# Altium PCB Arduino_三明治开发板_case01.PcbDoc
Units mil, origin at the board's own origin, x right, y up, seen from the top; angles counter-clockwise.
Board outline 2700 x 2100 mil, 2 copper layers (Top Layer, Bottom Layer), stack 46.444 mil thick; 32 components, 39 nets, 141 pads, 42 vias.
Unrouted connection lines stored in the file: 2.
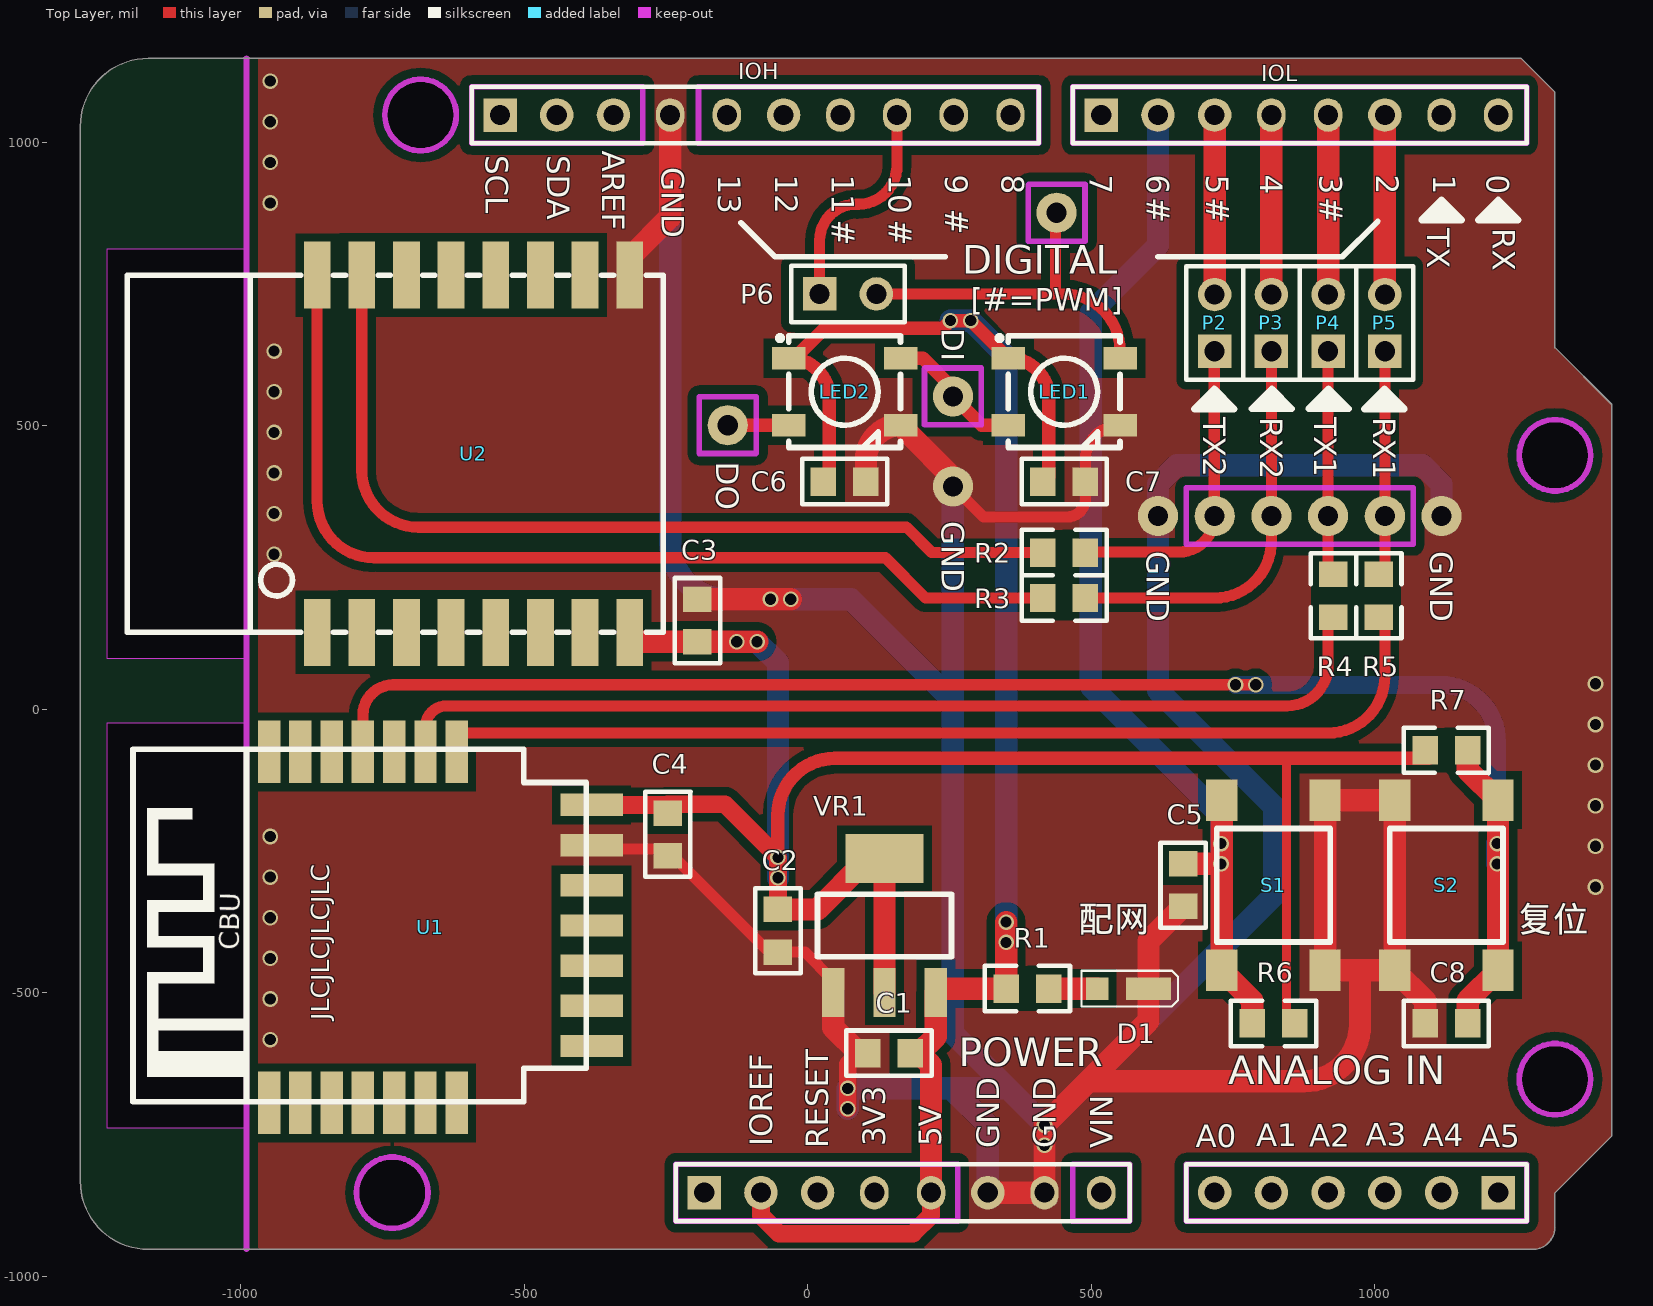
[diagram p0: Top Layer view]
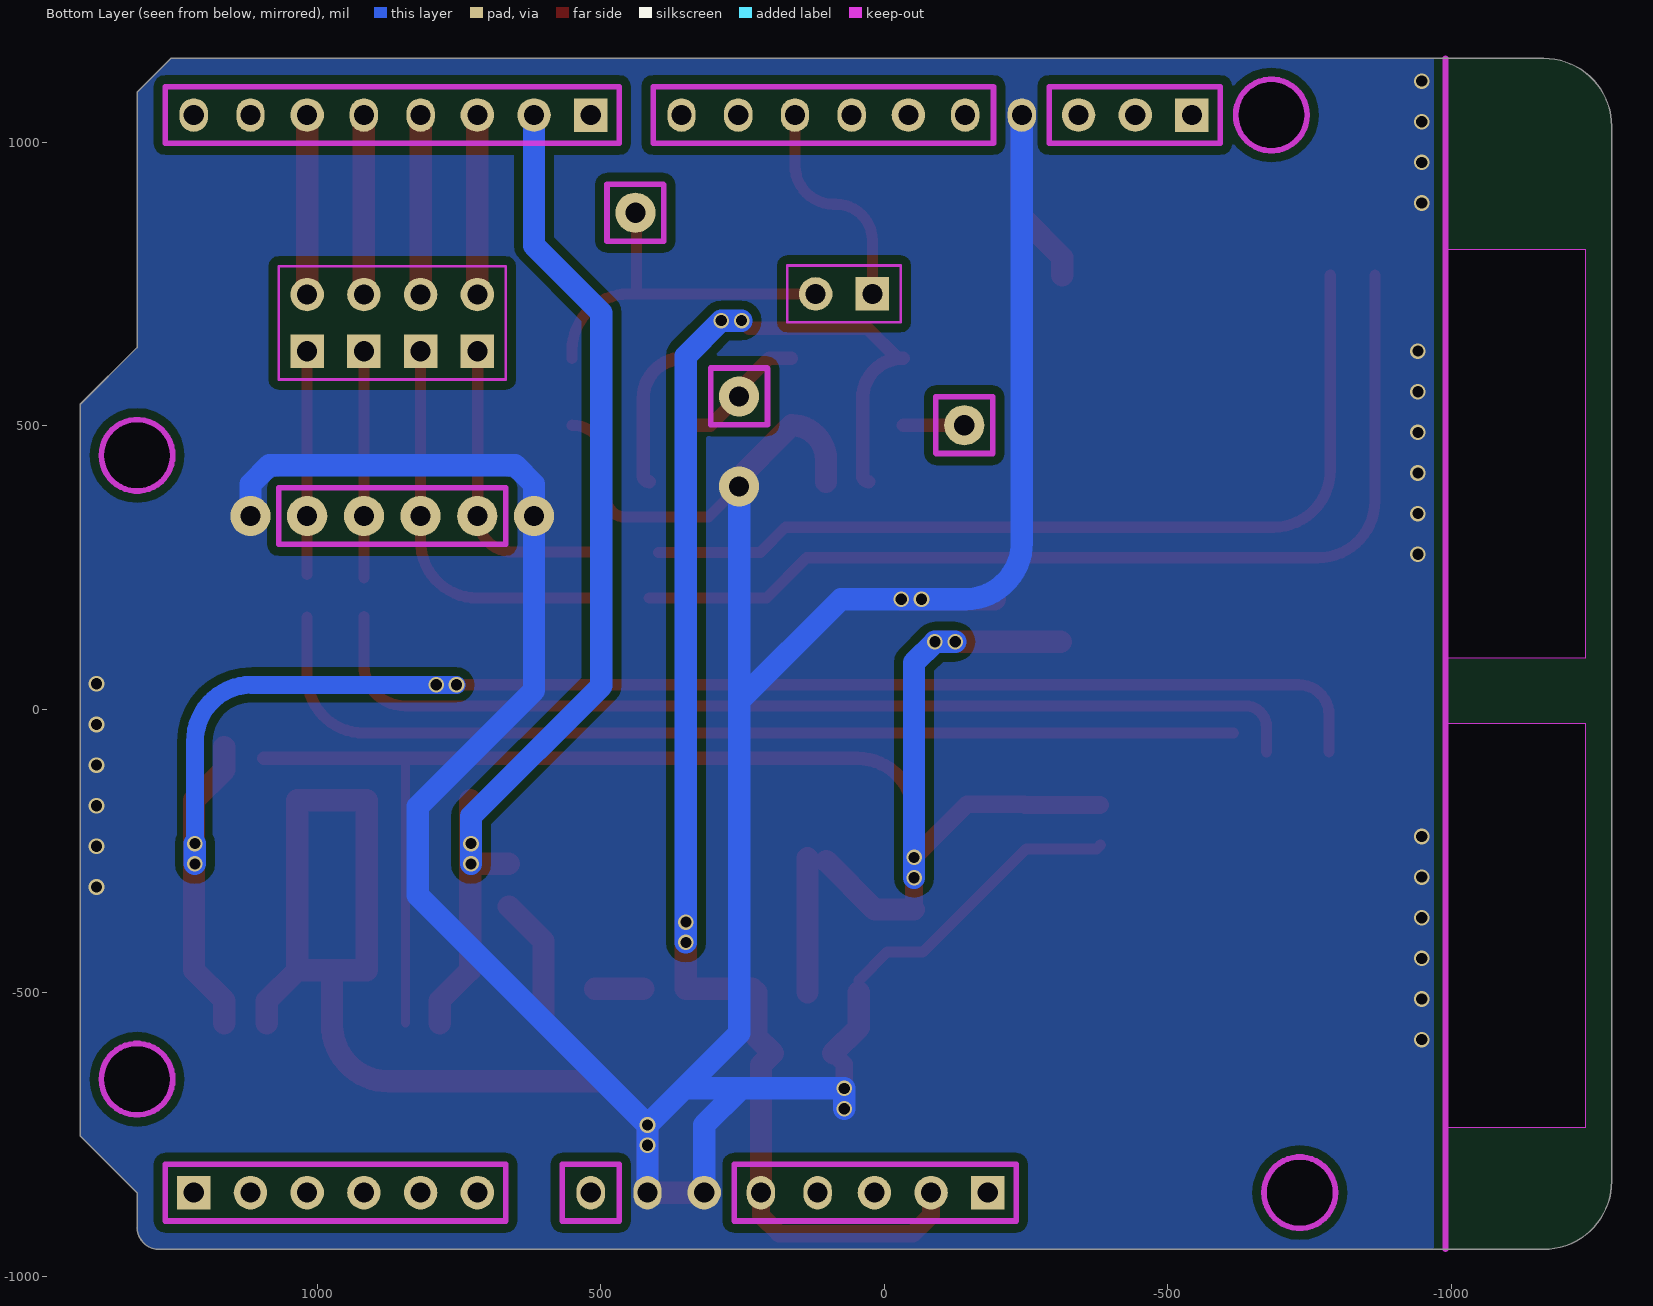
[diagram p1: Bottom Layer view, seen from below]

## Layer stack, top to bottom
Top Solder: solder mask 0.4, Solder Resist, Dk 3.5
Top Layer: signal copper 1.4
Dielectric 1: dielectric 43.6441, FR-4, Dk 4.8
Bottom Layer: signal copper 1.4
Bottom Solder: solder mask 0.4, Solder Resist, Dk 3.5

## Board outline
-1282.56,-832.42 -1282.56,1027.58 cw(c-1162.56,1027.58) -1162.56,1147.58 1257.44,1147.58 1317.44,1087.58 1317.44,637.58 1417.44,537.58 1417.44,-752.42 1317.44,-852.42 1317.44,-913.05 cw(c1278.07,-913.05) 1278.07,-952.42 -1162.56,-952.42 cw(c-1162.56,-832.42)
cut-out: -1235.73,89.49 -989.42,89.49 -989.42,811.25 -1235.73,811.25
cut-out: -1235.73,-738.31 -989.42,-738.31 -989.42,-24.42 -1235.73,-24.42
cut-out: -745.55,1047.58 ccw(c-682.56,1047.58) -682.56,984.59 ccw(c-682.56,1047.58) -619.57,1047.58 ccw(c-682.56,1047.58) -682.56,1110.57 ccw(c-682.56,1047.58)
cut-out: 1254.45,-652.42 ccw(c1317.44,-652.42) 1317.44,-715.41 ccw(c1317.44,-652.42) 1380.43,-652.42 ccw(c1317.44,-652.42) 1317.44,-589.43 ccw(c1317.44,-652.42)
cut-out: 1254.45,447.58 ccw(c1317.44,447.58) 1317.44,384.59 ccw(c1317.44,447.58) 1380.43,447.58 ccw(c1317.44,447.58) 1317.44,510.57 ccw(c1317.44,447.58)
cut-out: -795.55,-852.42 ccw(c-732.56,-852.42) -732.56,-915.41 ccw(c-732.56,-852.42) -669.57,-852.42 ccw(c-732.56,-852.42) -732.56,-789.43 ccw(c-732.56,-852.42)

## Design rules (kind name [scope] priority, off if disabled: settings)
Clearance [All] p1: gap=15
PolygonConnect [All] p1: connectstyle=Direct reliefconductorwidth=31.5 reliefentries=4 polygonreliefangle="90 Angle" airgapwidth=7.87
RoomDefinition Xduino_Uno [InComponentClass('Xduino_Uno')] p1: confinementstyle=ConfineIn formatcopy=TRUE lockcomponents=FALSE outline 1462.58,-997.84 1532.58,-997.84 1532.58,-871.84 1462.58,-871.84
RoutingVias [All] p1: holewidth=28 width=50 viastyle="Through Hole" minholewidth=28 minwidth=50 maxholewidth=28 maxwidth=50
SolderMaskExpansion [All] p1: expansion=4
Width [All] p1: maxlimit=100 minlimit=10 preferedwidth=10
29 further rules are at their usual default settings.

## Components (designator, comment, footprint, x,y, rotation, side; value= is the part's Value field where it differs from the comment)
"ANALOG IN" "单排插座 1×9T" HDR1X6Z 1217.44,-852.42 r180 top
C1 "1206 0.1uF" 0805-CAP-min 143.24,-606.48 r270 top
C2 "1206 0.1uF" 0805-CAP-min -52.58,-390.61 r180 top
C3 "1206 0.1uF" 0805-CAP-min -194.54,156.32 r0 top
C4 "1206 0.1uF" 0805-CAP-min -246.77,-220.82 r180 top
C5 "1206 0.1uF" 0805-CAP-min 661.94,-310.27 r0 top
C6 "1206 0.1uF" 0805-CAP-min 65.13,401.26 r90 top
C7 "1206 0.1uF" 0805-CAP-min 452.1,401.26 r90 top
C8 "1206 0.1uF" 0805-CAP-min 1125.96,-553.88 r270 top
D1 "LED" LED3014-FD 555.42,-492.73 r0 top
IOH "单排插座 1×12T" HDR1X10Z -542.56,1047.58 r0 top
IOL "单排插座 1×9T" HDR1X8Z 517.44,1047.58 r0 top
LED1 "WS2812C" LED-SMD_4P-L5.0-W5.0-TL 452.15,559.73 r0 top
LED2 "WS2812C" LED-SMD_4P-L5.0-W5.0-TL 65.18,559.73 r0 top
P2 "HDR1*2" HDR1X2 717.44,631.04 r90 top
P3 "HDR1*2" HDR1X2 817.44,631.04 r90 top
P4 "HDR1*2" HDR1X2 917.44,631.04 r90 top
P5 "HDR1*2" HDR1X2 1017.44,631.04 r90 top
P6 "HDR1*2" HDR1X2 20.94,732.19 r0 top
POWER "单排插座 1×9T" HDR1X8Z -182.56,-852.42 r0 top
R1 "0805 1K" 0805-R-min 387.26,-492.68 r270 top
R2 "0805 1K" 0805-R-min 452.1,275.99 r90 top
R3 "0805 1K" 0805-R-min 452.1,195.99 r90 top
R4 "0805 1K" 0805-R-min 926.74,200 r180 top
R5 "0805 1K" 0805-R-min 1006.84,200 r180 top
R6 "0805 1K" 0805-R-min 821.19,-553.88 r90 top
R7 "0805 1K" 0805-R-min 1125.86,-72.41 r270 top
S1 "SW-SPST" Switch 821.14,-310.32 r270 top locked
S2 "SW-SPST" Switch 1125.91,-310.32 r90 top locked
U1 "CBU Wi-Fi&Bluetooth 模组" "CBU WIFI&BLUETOOTH" -380.91,-381.36 r90 top locked
U2 "BT3L" BLUETOOTH-SMD_16P-L24.0-W16.0-P2.0-BT3L -589.39,450.37 r90 top locked
VR1 "AMS1117-3.3" SOT-223 135.28,-381.2 r270 top

## Footprints (in the part's own frame and the unit in brackets; to place one, negate y for a bottom-side part, rotate by r counter-clockwise, add the part's x,y. Pads: shape width x height; smd on the part's side, far side on the other; paste and mask are expansions set on the pad)
0805-CAP-min [mil]
  rect 50x45 smd: 1(0,37.52) 2(0,-37.5)
  silkscreen extent -40,-75 40,75, body extent -24,-39 24,39, height 20
0805-R-min [mil]
  rect 50x45 smd: 1(0,-37.52) 2(0,37.5)
  silkscreen extent -40,-75 40,75, body extent -24,-39 24,39, height 20
BLUETOOTH-SMD_16P-L24.0-W16.0-P2.0-BT3L [mm]
  rect 3x1.2 smd: 1(-8,7) 2(-8,5) 3(-8,3) 4(-8,1) 5(-8,-1) 6(-8,-3) 7(-8,-5) 8(-8,-7) 9(8,-7) 10(8,-5) 11(8,-3) 12(8,-1) 13(8,1) 14(8,3) 15(8,5) 16(8,7)
  silkscreen extent -8,-8.5 8,15.5
"CBU WIFI&BLUETOOTH" [mm]
  rect 2.8x1 smd: 1(-7.947,14.446) 2(-7.947,13.046) 3(-7.947,11.646) 4(-7.947,10.246) 5(-7.947,8.846) 6(-7.947,7.446) 7(-7.947,6.046) 15(7.773,6.046) 16(7.773,7.446) 17(7.773,8.846) 18(7.773,10.246) 19(7.773,11.646) 20(7.773,13.046) 21(7.773,14.446)
  rect 1x2.8 smd: 8(-5.4,0) 9(-3.6,0) 10(-1.8,0) 11(0,0) 12(1.8,0) 13(3.6,0) 14(5.4,0)
  silkscreen extent -7.9,0.25 7.9,20.55
HDR1X2 [mm] "Connector; Header; 2 Position"
  rect 1.5x1.5 hole 0.9: 1(0,0)
  round 1.5 hole 0.9: 2(2.54,0)
  silkscreen extent -1.27,-1.27 3.81,1.27
HDR1X6Z [mm] "Connector; Header; 5 Position"
  rect 1.5x1.5 hole 0.9: 1(0,0)
  round 1.5 hole 0.9: 2(2.54,0) 3(5.08,0) 4(7.62,0) 5(10.16,0) 6(12.7,0)
  silkscreen extent -1.27,-1.27 13.97,1.27, body extent -1.27,-1.25 13.97,1.25, height 8.65
HDR1X8Z [mm] "Connector; Header; 8 Position"
  rect 1.5x1.5 hole 0.9: 1(0,0)
  round 1.5 hole 0.9: 2(2.54,0) 3(5.08,0) 6(12.7,0)
  oval 1.27x1.5 hole 0.9: 4(7.62,0) 5(10.16,0) 7(15.24,0) 8(17.78,0)
  silkscreen extent -1.27,-1.27 19.05,1.27, body extent -1.27,-1.25 19.05,1.25, height 8.65
HDR1X10Z [mm] "Connector; Header; 10 Position"
  rect 1.5x1.5 hole 0.9: 1(0,0)
  round 1.5 hole 0.9: 2(2.54,0) 3(5.08,0) 6(12.7,0)
  oval 1.27x1.5 hole 0.9: 4(7.62,0) 5(10.16,0) 7(15.24,0) 8(17.78,0) 9(20.32,0) 10(22.86,0)
  silkscreen extent -1.27,-1.27 24.13,1.27, body extent -1.27,-1.25 24.13,1.25, height 8.65
LED3014-FD [mm]
  rect 1x1 smd: 1(-1.15,0)
  rect 2x1 smd: 2(1.15,0)
  silkscreen extent -1.85,-0.8 2.47,0.8
LED-SMD_4P-L5.0-W5.0-TL [mm]
  rect 1.5x1 smd: 1(-2.5,1.5) 2(-2.5,-1.5) 3(2.5,-1.5) 4(2.5,1.5)
  silkscreen extent -3,-2.5 2.5,2.5
SOT-223 [mm]
  rect 2.2x1 smd: 1(3,-2.3) 2(3,0) 3(3,2.3)
  rect 2.2x3.5 smd: 2(-3,0)
  silkscreen extent -1.4,-3 1.4,3, body extent -3.49,-3.24 3.49,3.24, height 1.64
Switch [mm]
  rect 1.85x1.4 smd mask+0.102: 1(-3.81,2.312) 1(3.81,2.312) 2(-3.81,-2.312) 2(3.81,-2.312)
  silkscreen extent -2.54,-2.54 2.54,2.54

## Part data
"ANALOG IN": library part "Header 6", "Header, 6-Pin"
C1 C2 C3 C4 C5 C6 C7 C8: library part Cap-1206, "Capacitor"
D1: library part LED-3014
IOH: library part "Header 10", "Header, 10-Pin"
IOL POWER: library part "Header 8", "Header, 8-Pin"
P2 P3 P4 P5 P6: library part HDR1*2_2
R1 R2 R3 R4 R5 R6 R7: library part Res-0805, "Resistor"
S1 S2: "Single-Pole, Single-Throw Switch"
VR1: library part "SOT-223 AMS1117-3.3", "低压差线性稳压(LDO)"

## Free pads (board coordinates)
  round 70.87 hole 35.43: 38(1017.49,340.53) 39(917.49,340.53) 40(817.49,340.53) 41(-141.07,500.68) 41(255.91,392.86) 41(255.91,551.55) 41(438.78,875.32) 41(617.49,340.53) 41(717.49,340.53) 41(1117.49,340.53)

## Via types
v1: diameter 27.56, hole 19.68, Top Layer to Bottom Layer, 42 vias

## Nets (pads, with @x,y where several pads share a name; then routed paths per layer and width w, separated by ;. In a path a pad name is that pad's centre, name@x,y a point inside that pad or via, vN(x,y) a via of type N, cw(c..) or ccw(c..) an arc to the next point about the centre after c; other vN are vias at no path point)
+3V3: POWER.4 | length 8.5
  Bottom Layer w39.37: POWER.4 POWER.4@117.44,-843.91
+3V3_2: C2.2 C3.2 C4.2 R6.1 R7.1 U1.14 U2.8 VR1.2 | length 3313.2
  Top Layer w15.75: R6.1@844.17,-553.6 844.17,-91.04
  Top Layer w23.62: v1(-52.58,-261.23) -52.58,-186.84 cw(c47.42,-186.84) 47.42,-86.84 840.45,-86.84 R7.1@1093.77,-86.84
  Top Layer w31.5: U1.14 C4.2@-247.87,-168.77 ; C4.2@-246.77,-167.67 -146.14,-167.67 v1(-52.58,-261.23) v1(-52.58,-297.04) C2.2
  Top Layer w39.37: U2.8@-311.17,118.82 v1(-89.3,118.82) ; C2.2 16.92,-353.11 VR1.2@102.12,-267.92 ; VR1.2@135.28,-499.31 VR1.2@135.28,-263.09
  Bottom Layer w39.37: v1(-125.12,118.82) v1(-89.3,118.82) -52.58,82.1 v1(-52.58,-261.23) v1(-52.58,-297.04)
+5V: C1.1 C6.1 C7.1 LED1.1 LED2.1 POWER.2 POWER.5 R1.1 VR1.3 | length 3144.2
  Top Layer w23.62: C6.1 ccw(c27.61,411.88) 38.23,411.88 38.23,547.31 ccw(c-33.25,547.31) LED2.1 -23.27,618.78 29.92,671.97 238.39,671.97 v1(251.56,685.13) v1(287.37,685.13) LED1.1 cw(c353.72,547.44) 425.07,547.44 425.07,411.75 cw(c414.58,411.75) C7.1
  Top Layer w31.5: POWER.2 -82.56,-892.66 -50.47,-924.75 185.33,-924.75 217.44,-892.63 POWER.5
  Top Layer w39.37: POWER.5 217.44,-627.53 196.39,-606.48 225.83,-577.04 VR1.3 ; VR1.3@232.47,-492.68 R1.1 v1(349.74,-375.4)
  Bottom Layer w39.37: v1(251.56,685.13) v1(287.37,685.13) 349.74,622.76 v1(349.74,-375.4) v1(349.74,-411.22)
AD0: "ANALOG IN.6"
AD1: "ANALOG IN.5"
AD2: "ANALOG IN.4"
AD3: "ANALOG IN.3"
AD4/SDA: "ANALOG IN.2" IOH.2
AD5/SCL: "ANALOG IN.1" IOH.1
AREF: IOH.3
GND: C1.2 C2.1 C3.1 C4.1 C5.2 C6.2 C7.2 C8.2 D1.2 IOH.4 LED1.3 LED2.3 pad.41@255.91,392.86 pad.41@617.49,340.53 pad.41@1117.49,340.53 POWER.6 POWER.7 S1.1 S2.1 U1.13 U2.9 VR1.1 | length 9586.7
  Top Layer w19.68: U1.13 -374.03,-246.52 -250.21,-246.52 -68.59,-428.13 C2.1 -5.1,-428.13 44.73,-477.96 VR1.1 ; pad.41@255.91,392.86 309.96,338.81 457.16,338.81 ccw(c457.16,371.24) 489.6,371.24 C7.2 489.6,439.71 cw(c550.57,439.71) LED1.3
  Top Layer w31.5: v1(70.44,-704.41) 70.44,-626.13 C1.2@90.09,-606.48
  Top Layer w39.37: U2.9 -313.8,796.26 -242.56,867.5 IOH.4 ; C3.1 v1(-29.87,193.84) ; VR1.1 44.73,-561.12 C1.2@90.09,-606.48 ; C6.2 102.63,439.71 cw(c163.6,439.71) LED2.3 pad.41@271.43,392.86 ; POWER.6 POWER.7 v1(417.44,-768.91) v1(417.44,-733.1) 600.7,-549.84 D1.2 600.7,-409.01 C5.2 ; 496.01,-656.22 873.61,-656.22 ccw(c873.61,-556.22) 973.61,-556.22 973.61,-460.32 ; C8.2 1088.46,-513.9 S2.1@1034.89,-460.32 ; 973.61,-460.32 S2.1@1034.89,-460.32 ; 973.61,-460.32 912.16,-460.32 912.16,-160.32 1034.89,-160.32 S2.1@1034.89,-460.32
  Bottom Layer w39.37: IOH.4 -242.56,293.84 ccw(c-142.56,293.84) -142.56,193.84 76.19,193.84 255.91,14.13 255.91,-89.66 ; v1(70.44,-704.41) v1(70.44,-668.6) 352.94,-668.6 ; 252.94,-668.6 317.44,-733.1 POWER.6 ; pad.41@255.91,392.86 255.91,-89.66 ; POWER.7 v1(417.44,-768.91) v1(417.44,-733.1) ; pad.41@1107.18,350.84 1117.49,340.53 1117.49,396.66 1083.93,430.21 651.05,430.21 617.49,396.65 617.49,340.53 617.49,33.14 822.29,-171.66 822.29,-328.25 v1(417.44,-733.1) ; 255.91,-89.66 255.91,-571.56 352.94,-668.6 ; 352.94,-668.6 v1(417.44,-733.1)
  other v1: -947.58,-582.64 -947.58,-511.01 -947.58,-439.38 -947.58,-367.76 1388.9,-313.39 -947.58,-296.13 1388.9,-241.77 -947.58,-224.51 1388.9,-170.14 1388.9,-98.52 1388.9,-26.89 1388.9,44.73 -65.68,193.84 -940.89,273.18 -940.89,344.81 -940.89,416.43 -940.89,488.06 -940.89,559.68 -940.89,631.31 -947.58,892.51 -947.58,964.13 -947.58,1035.76 -947.58,1107.39
IO0: IOL.8
IO1: IOL.7
IO2: IOL.6 P5.2 | length 297
  Top Layer w39.37: P5.2@1017.44,750.54 IOL.6
IO3: IOL.5 P4.2 | length 297
  Top Layer w39.37: P4.2@917.44,750.54 IOL.5
IO4: IOL.4 P3.2 | length 297
  Top Layer w39.37: P3.2@817.44,750.54 IOL.4
IO5: IOL.3 P2.2 | length 316.5
  Top Layer w39.37: P2.2 IOL.3
IO6: C5.1 IOL.2 R6.2 S1.2 | length 1947.2
  Top Layer w39.37: C5.1 v1(728.63,-272.75) ; S1.2@730.12,-160.32 730.12,-460.32 783.69,-513.9 R6.2
  Bottom Layer w39.37: IOL.2 617.44,817.62 498.71,698.89 498.71,41.14 728.63,-188.78 v1(728.63,-236.94) v1(728.63,-272.75)
IO7: IOL.1
IO8: IOH.10
IO9: IOH.9
IO10: IOH.8 P6.1 | length 395
  Top Layer w19.68: P6.1 20.94,826.14 cw(c85.17,826.14) 85.17,890.38 89.04,890.38 ccw(c89.04,958.78) 157.44,958.78 IOH.8
IO11: IOH.7
IO12: IOH.6
IO13: IOH.5
NetD1_1: D1.1 R1.2 | length 85.3
  Top Layer w39.37: R1.2 D1.1@510.1,-492.68
NetLED1_2: LED1.2 LED2.4 | length 247.5
  Top Layer w23.62: LED2.4 203.17,618.78 255.91,566.05 255.91,551.55 306.77,500.68 LED1.2
NetLED1_4: LED1.4 P6.2 pad.41@438.78,875.32 | length 638.9
  Top Layer w19.68: P6.2 450.57,732.19 cw(c450.57,632.19) 550.57,632.19 LED1.4 ; 437.04,734.86 pad.41@437.04,873.58
NetR2_2: R2.2 U2.15 | length 1604.6
  Top Layer w19.68: U2.15 -786.24,420.85 ccw(c-686.24,420.85) -686.24,320.85 173.77,320.85 218.64,275.98 R2.2@398.26,275.98
NetR3_2: R3.2 U2.16 | length 1758.5
  Top Layer w19.68: U2.16 -864.98,367.01 ccw(c-764.98,367.01) -764.98,267.01 ; -759.11,267.01 136.76,267.01 207.79,195.99 R3.2
NetR4_2: R4.2 U1.16 | length 1782.8
  Top Layer w19.68: U1.16 -674.06,-31.55 cw(c-636.61,-31.55) -636.61,5.9 845.15,5.9 ccw(c845.15,78.24) 917.49,78.24 R4.2@917.49,163.04
NetR5_2: R5.2 U1.15 | length 1794.5
  Top Layer w19.68: U1.15@-615.39,-42.03 917.49,-42.03 ccw(c917.49,57.97) 1017.49,57.97 R5.2@1017.49,162.5
RESET: POWER.3
RST: C8.1 R7.2 S2.2 U1.18 | length 2935.2
  Top Layer w19.68: U1.18 -784.3,-10.37 cw(c-730.97,-10.37) -730.97,42.96 v1(754.08,42.96) v1(789.9,42.96)
  Top Layer w39.37: C8.1 1163.48,-513.78 1216.94,-460.32 1216.94,-160.32 1163.48,-106.87 R7.2@1163.48,-66.77
  Bottom Layer w31.5: v1(754.08,42.96) v1(789.9,42.96) 1115.45,42.96 cw(c1115.45,-57.04) 1215.45,-57.04 v1(1215.45,-236.94)
  Bottom Layer w39.37: v1(1215.45,-272.75) v1(1215.45,-236.94)
RX1: P5.1 pad.38 R5.1 | length 393.5
  Top Layer w19.68: R5.1@1017.49,237.52 P5.1
RX2: P3.1 pad.40 R3.1 | length 718.2
  Top Layer w19.68: R3.1@491.46,195.99 717.49,195.99 ccw(c717.49,295.99) 817.49,295.99 pad.40 P3.1
TX1: P4.1 pad.39 R4.1 | length 399.2
  Top Layer w19.68: R4.1@917.49,231.86 P4.1
TX2: P2.1 pad.41@717.49,340.53 R2.1 | length 539.1
  Top Layer w19.68: R2.1@505.15,276.99 653.95,276.99 ccw(c653.95,340.53) pad.41@717.49,340.53 ; pad.41@716.64,340.53 P2.1@716.64,631.04
VIN: POWER.8
pads on no net: LED2.2 POWER.1 U1.1 U1.2 U1.3 U1.4 U1.5 U1.6 U1.7 U1.8 U1.9 U1.10 U1.11 U1.12 U1.17 U1.19 U1.20 U1.21 U2.1 U2.2 U2.3 U2.4 U2.5 U2.6 U2.7 U2.10 U2.11 U2.12 U2.13 U2.14
copper on no net: | length 107.8
  Top Layer w23.62: -141.07,500.68 -33.25,500.68

## Polygon pours and split planes (outlines as drawn)
GND on Top Layer "Top Layer-No Net" (solid, remove dead copper, pour order 2): -1282.56,-832.42 -1282.56,1027.58 cw(c-1162.56,1027.58) -1162.56,1147.58 1257.44,1147.58 1317.44,1087.58 1317.44,637.58 1417.44,537.58 1417.44,-752.42 1317.44,-852.42 1317.44,-913.05 cw(c1278.07,-913.05) 1278.07,-952.42 -1162.56,-952.42 cw(c-1162.56,-832.42)
GND on Bottom Layer "Top Layer-No Net" (solid, remove dead copper, pour order 3): -1282.56,-832.42 -1282.56,1027.58 cw(c-1162.56,1027.58) -1162.56,1147.58 1257.44,1147.58 1317.44,1087.58 1317.44,637.58 1417.44,537.58 1417.44,-752.42 1317.44,-852.42 1317.44,-913.05 cw(c1278.07,-913.05) 1278.07,-952.42 -1162.56,-952.42 cw(c-1162.56,-832.42)

## Keep-outs
Keep-Out Layer:
  circle w10: c1317.44,447.58 r62.99
  circle w10: c-732.56,-852.42 r62.99
  circle w10: c-682.56,1047.58 r62.99
  circle w10: c1317.44,-652.42 r62.99
  lines w5: -29.06,682.19 -29.06,782.19 170.94,782.19 170.94,682.19 -29.06,682.19 ; 667.44,581.04 667.44,781.04 1067.44,781.04 1067.44,581.04 667.44,581.04
  lines w10: -989.42,-952.42 -989.42,1147.58 ; -592.56,1096.8 -592.56,997.58 -290.75,997.58 -290.75,1097.58 -592.56,1097.58 ; -232.56,-803.2 -232.56,-902.42 264.63,-902.42 264.63,-802.42 -232.56,-802.42 ; -192.56,1096.8 -192.56,997.58 407.44,997.58 407.44,1097.58 -192.56,1097.58 ; -191.07,549.9 -191.07,450.68 -91.85,450.68 ; -190.29,550.69 -91.07,550.69 ; -91.07,451.47 -91.07,550.68 ; 205.9,600.76 205.9,501.55 305.12,501.54 ; 206.69,601.55 305.91,601.55 ; 305.91,501.55 305.91,600.76 ; 388.78,924.54 388.78,825.32 487.99,825.32 ; 389.57,925.33 488.78,925.33 ; 467.44,-803.2 467.44,-902.42 567.44,-902.42 567.44,-802.42 467.44,-802.42 ; 467.44,1096.8 467.44,997.58 1267.43,997.58 1267.44,1097.58 467.44,1097.58 ; 488.78,825.32 488.78,924.54 ; 667.44,-803.2 667.44,-902.42 1267.44,-902.42 1267.44,-802.42 667.44,-802.42 ; 667.49,389.75 667.49,290.53 1067.49,290.53 1067.49,389.75 ; 667.49,390.53 1067.49,390.53 ; -191.07,550.69 -91.85,550.69 -191.07,550.69

## Silkscreen, mask and mechanical layers (free items; w line width, h text height)
Top Overlay:
  lines w10: -117.56,857.58 -57.56,797.58 242.44,797.58 ; 617.44,797.58 942.44,797.58 1004.94,860.08
  lines w12: 696.76,534.31 716.76,554.31 736.76,534.31 706.76,534.31 721.76,544.31 ; 798.18,534.67 818.18,554.67 838.18,534.67 808.18,534.67 823.18,544.67 ; 898.19,534.67 918.19,554.67 938.19,534.67 908.19,534.67 923.19,544.67 ; 996.77,534.31 1016.77,554.31 1036.77,534.31 1006.77,534.31 1021.77,544.31 ; 1097.44,867.58 1117.44,887.58 1137.44,867.58 1107.44,867.58 1122.44,877.58 ; 1197.44,867.58 1217.44,887.58 1237.44,867.58 1207.44,867.58 1222.44,877.58 ; 681.76,529.31 751.76,529.31 716.76,564.31 681.76,529.31 ; 783.18,529.67 818.18,564.67 853.18,529.67 783.18,529.67 ; 883.19,529.67 953.19,529.67 918.19,564.67 883.19,529.67 ; 981.77,529.31 1016.77,564.31 1051.77,529.31 981.77,529.31 ; 1082.44,862.58 1152.44,862.58 1117.44,897.58 1082.44,862.58 ; 1182.44,862.58 1252.44,862.58 1217.44,897.58 1182.44,862.58
  text "AREF" at -362.56,984.25 h40 r270
  text "SCL" at -567.56,976.38 h40 r270
  text "SDA" at -459.35,976.38 h40 r270
  text "GND" at -257.56,955.85 h40 r270
  text "13" at -157.56,942.58 h40 r270
  text "12" at -57.56,942.58 h40 r270
  text "11" at 42.44,942.58 h40 r270
  text "10" at 142.44,942.58 h40 r270
  text "9" at 242.44,942.58 h40 r270
  text "8" at 342.44,942.58 h40 r270
  text "7" at 497.44,942.58 h40 r270
  text "6" at 597.44,942.58 h40 r270
  text "5" at 702.44,942.58 h40 r270
  text "4" at 797.44,942.58 h40 r270
  text "3" at 902.44,942.58 h40 r270
  text "2" at 1002.44,942.58 h40 r270
  text "1" at 1102.44,942.58 h40 r270
  text "0" at 1197.44,942.58 h40 r270
  text "#" at 597.44,902.58 h40 r270
  text "#" at 702.44,902.58 h40 r270
  text "#" at 902.44,902.58 h40 r270
  text "#" at 242.44,882.58 h40 r270
  text "#" at 42.44,862.58 h40 r270
  text "#" at 142.44,862.58 h40 r270
  text "TX" at 1092.44,847.58 h40 r270
  text "RX" at 1207.44,847.58 h40 r270
  text "DIGITAL" at 272.44,767.58 h50
  text "[#=PWM]" at 287.44,702.58 h40
  text "DI" at 235.91,671.97 h40 r270
  text "TX2" at 697.49,514.67 h40 r270
  text "RX2" at 797.49,514.67 h40 r270
  text "TX1" at 893.19,514.67 h40 r270
  text "RX1" at 997.45,514.31 h40 r270
  text "DO" at -161.06,436.52 h40 r270
  text "GND" at 235.91,331.13 h40 r270
  text "GND" at 597.48,278.8 h40 r270
  text "GND" at 1097.48,278.8 h40 r270
  text "配网" at 477.74,-407.34 h78.74
  text "复位" at 1251.92,-407.82 h78.74
  text "JLCJLCJLCJLC" at -833.37,-548.37 h55.12 r90
  text "A3" at 984.12,-769.42 h40
  text "IOREF" at -62.56,-770.42 h40 r90
  text "3V3" at 136.44,-770.42 h40 r90
  text "5V" at 235.44,-770.42 h40 r90
  text "A1" at 790.78,-770.42 h40
  text "A4" at 1084.12,-770.42 h40
  text "A2" at 884.12,-771.42 h40
  text "A5" at 1184.12,-771.92 h40
  text "A0" at 684.12,-772.42 h40
  text "RESET" at 36.44,-774.42 h40 r90
  text "GND" at 337.43,-774.42 h40 r90
  text "GND" at 437.43,-774.42 h40 r90
  text "VIN" at 537.43,-774.42 h40 r90
Mechanical 1:
  circle w10: c1317.44,447.58 r62.99
  circle w10: c-732.56,-852.42 r62.99
  circle w10: c-682.56,1047.58 r62.99
  circle w10: c1317.44,-652.42 r62.99
  lines w10: -1282.56,-832.42 ccw(c-1162.56,-832.42) -1162.56,-952.42 1278.07,-952.42 ccw(c1278.07,-913.05) 1317.44,-913.05 1317.44,-852.42 1417.44,-752.42 1417.44,537.58 1317.44,637.58 1317.44,1087.58 1257.44,1147.58 -1162.56,1147.58 ccw(c-1162.56,1027.58) -1282.56,1027.58 -1282.56,-832.42
  lines w11.81: -1235.73,-738.31 -1235.73,-24.42 -989.42,-24.42 -989.42,-738.31 -1235.73,-738.31 ; -1235.73,89.49 -1235.73,811.25 -989.42,811.25 -989.42,89.49 -1235.73,89.49

## Text inside footprints (layer, text, board x,y; h text height)
U1: Top Overlay "CBU" at -991.99,-425.14 h59.05 r89